# Altium PCB ES_Class6C_2L.PcbDoc
Units mil, origin at the board's own origin, x right, y up, seen from the top; angles counter-clockwise.
Board outline 1574.8 x 1181.1 mil, 2 copper layers (Top Layer, Bottom Layer), stack 62.441 mil thick; 37 components, 41 nets, 172 pads, 46 vias.
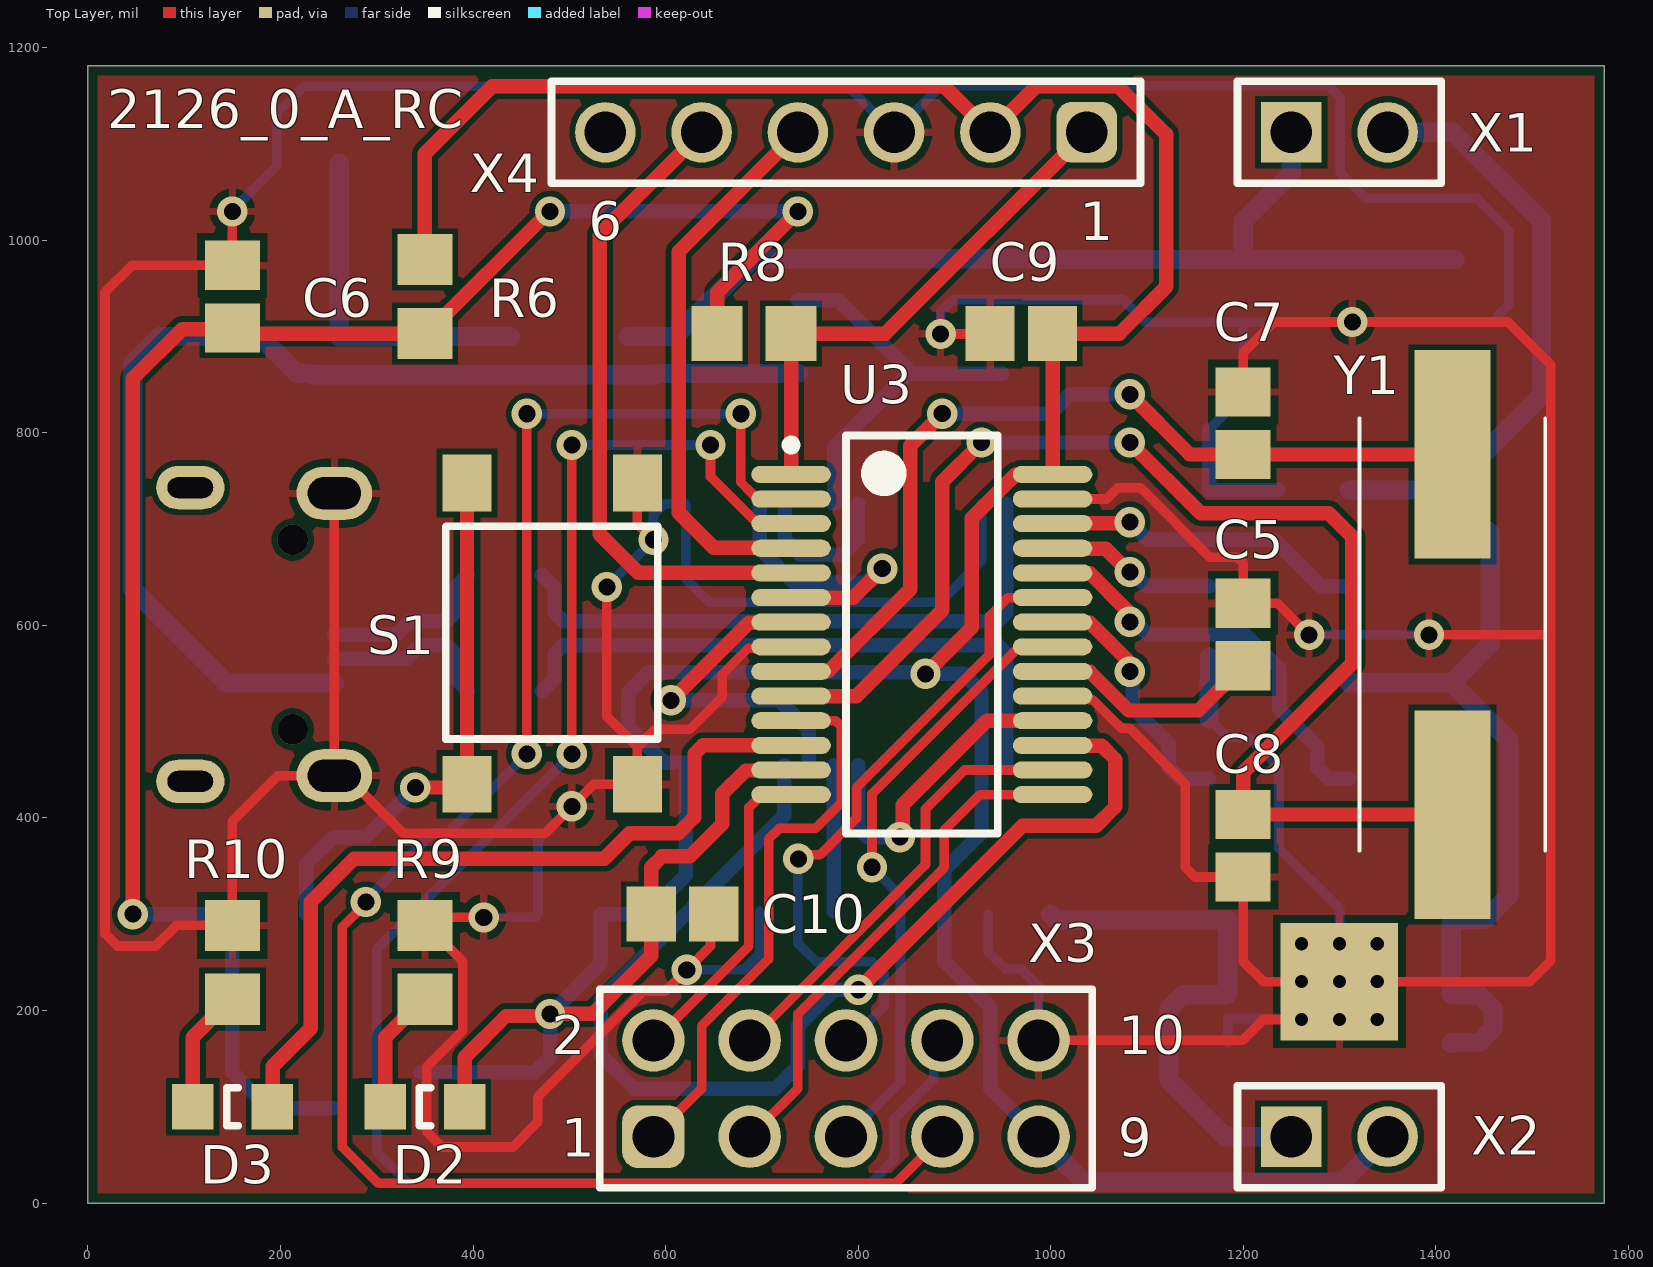
[diagram p0: Top Layer view]
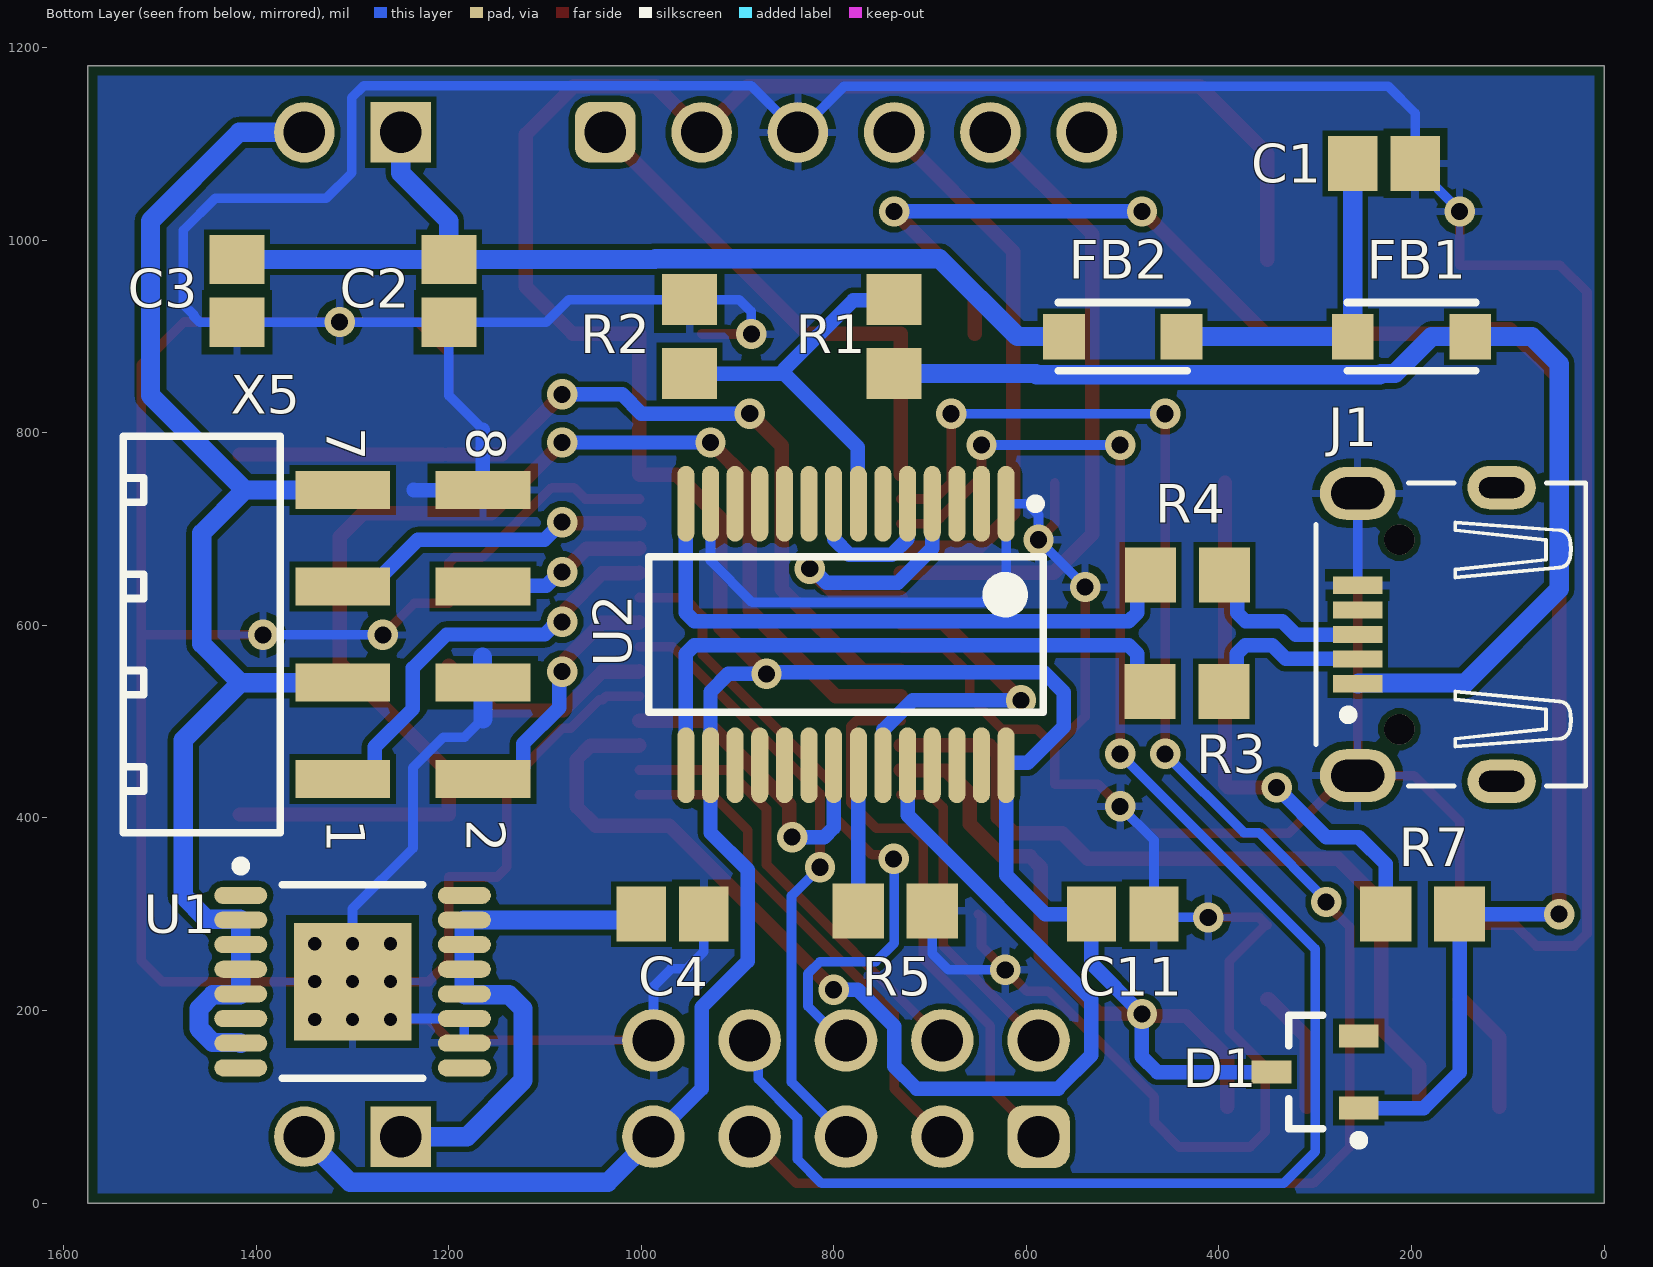
[diagram p1: Bottom Layer view, seen from below]
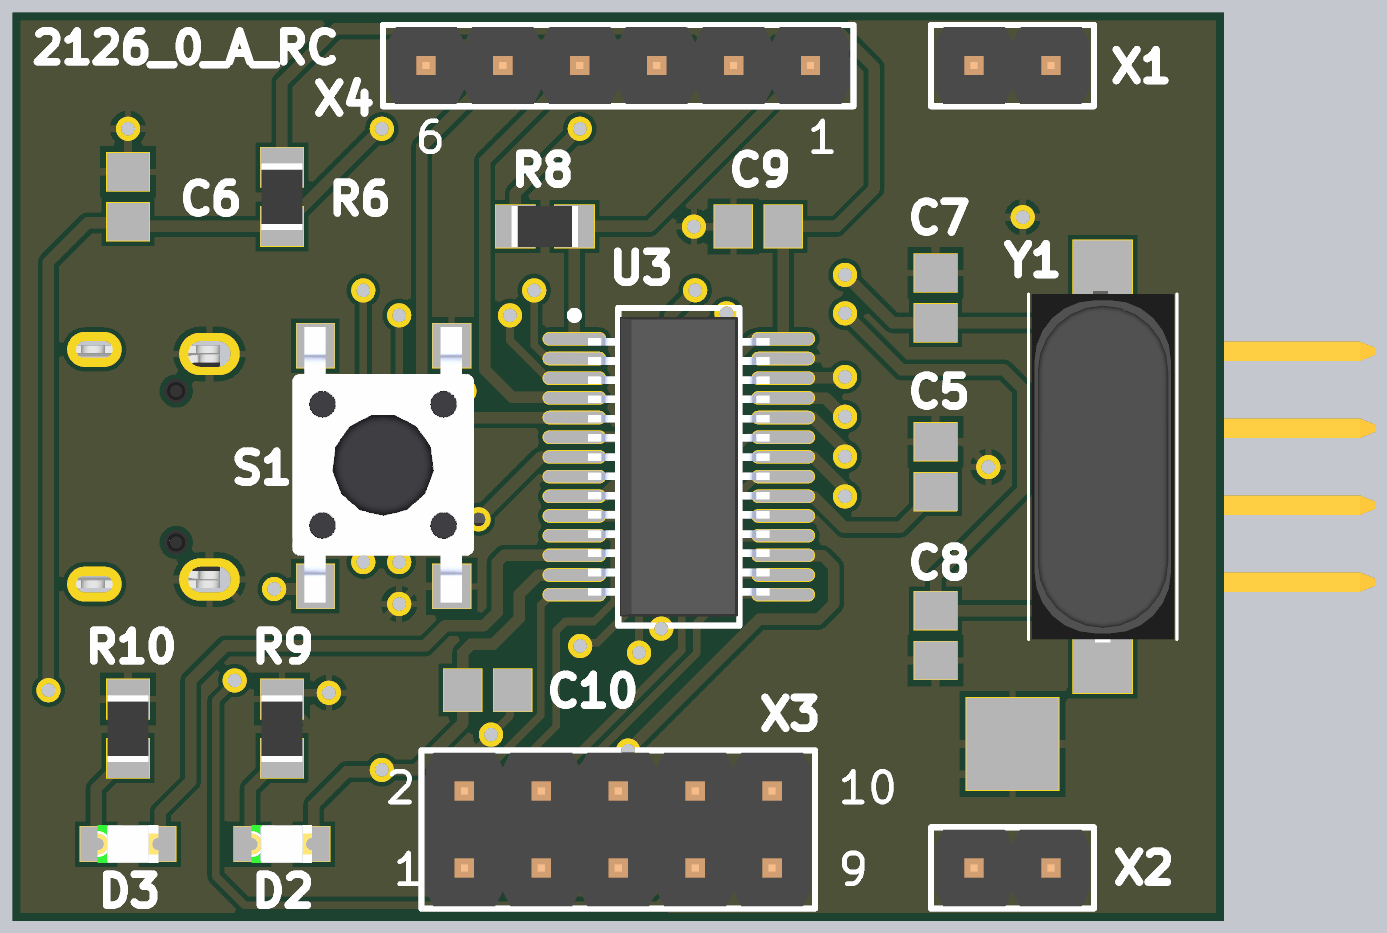
[diagram p2: 3D render of the assembled board from above, using the file's embedded part models]
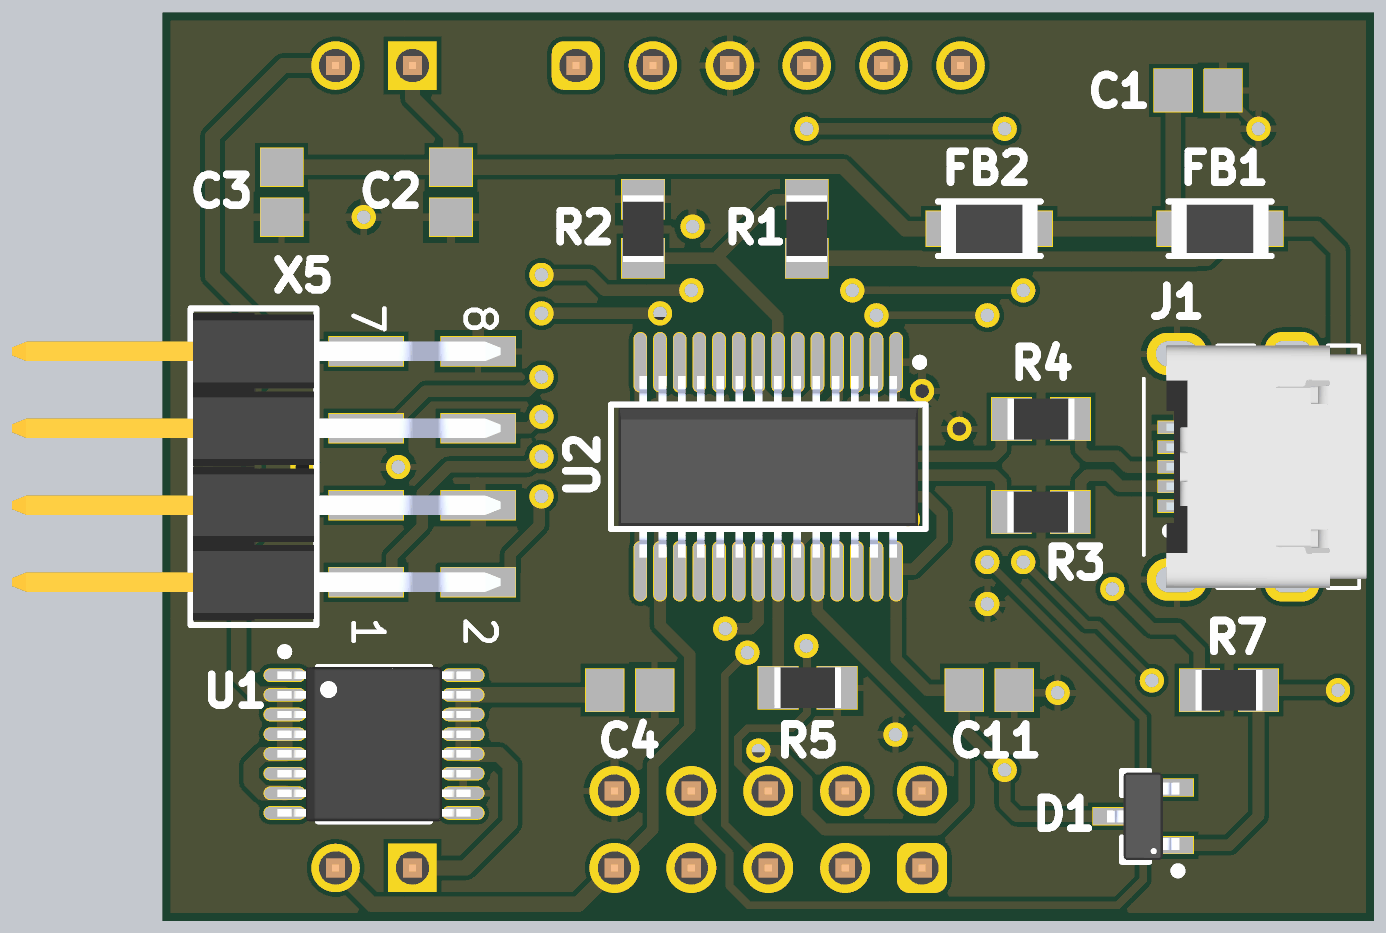
[diagram p3: 3D render of the assembled board from below, using the file's embedded part models]

## Layer stack, top to bottom
Top Solder: solder mask 0.4, Solder Resist, Dk 3.5
Top Layer: signal copper 0.7087
Dielectric1: core 61.0236, FR-4, Dk 4.8
Bottom Layer: signal copper 0.7087
Bottom Solder: solder mask 0.4, Solder Resist, Dk 3.5

## Board outline
0,0 0,1181.1 1574.8,1181.1 1574.8,0

## Design rules (kind name [scope] priority, off if disabled: settings)
BoardOutlineClearance [All] p1: gap=9.84 ignorepadtopadclearanceinfootprint=FALSE except(0: Arc-SplitContinuation Track-SplitContinuation SMDPad-SplitContinuation THPad-SplitContinuation Via-SplitContinuation Fill-SplitContinuation Poly-SplitContinuation Region-SplitContinuation Text-SplitContinuation)
Clearance Clearance-xPP-xTP-xTT [All] p1: gap=5.91 ignorepadtopadclearanceinfootprint=FALSE except(0: Arc-Hole Track-Hole SMDPad-Hole THPad-Hole Via-Hole Fill-Hole Poly-Hole Region-Hole Text-Hole; 5.92: Arc-Fill Arc-Poly Arc-Region Track-Fill Track-Poly Track-Region; 5.94: SMDPad-Fill SMDPad-Poly SMDPad-Region THPad-Fill THPad-Poly THPad-Region Via-Fill Via-Poly Via-Region Fill-Fill Fill-Poly Fill-Region Poly-Poly Poly-Region Region-Region)
ComponentClearance [All] p1: gap=9.84 collisioncheckmode=3 verticalgap=9.84 showdistances=FALSE
DiffPairsRouting [All] p1: maxlimit=9.84 minlimit=9.84 mostfreqgap=9.84 toplayer_minwidth=15 toplayer_maxwidth=15 toplayer_prefwidth=15 bottomlayer_minwidth=15 bottomlayer_maxwidth=15 bottomlayer_prefwidth=15 maxuncoupledlength=492.13
Height [All] p1: minheight=0 maxheight=984.25 prefheight=492.13
HoleSize HoleSize-PTH [All] p1: absolutevalues=TRUE maxlimit=393.7 minlimit=9.84 maxpercent=80.000 minpercent=20.000
HoleToHoleClearance [All] p1: gap=13.78 allowstackedmicrovias=TRUE
MinimumAnnularRing "Minimum IAR  >0.45mm" [((ObjectKind = 'Pad') OR (ObjectKind = 'Via')) And (Layer = 'MultiLayer') And (HoleDiameter > AsMM(0.45))] p1: minimumring=6.89 // minimum inner annular ring for pads > 0.45mm finished hole size
MinimumAnnularRing "Minimum IAR <=0.45mm" [((ObjectKind = 'Pad') OR (ObjectKind = 'Via')) And (Layer = 'MultiLayer') And (HoleDiameter <= AsMM(0.45))] p2: minimumring=6.89 // minimum inner annular ring for pads <= 0.45mm finished hole size
MinimumSolderMaskSliver [All] p1: minsoldermaskwidth=3.15
PasteMaskExpansion [All] p1: expansion=-0.98
PlaneClearance PlaneClearance-IPI [All] p1: clearance=7.87
PlaneConnect [All] p1: planeconnectstyle=Relief reliefexpansion=6.89 reliefentries=4 reliefconductorwidth=7.87 reliefairgap=7.87
PolygonConnect PolygonConnect-xTW [All] p1: connectstyle=Relief reliefconductorwidth=7.87 reliefentries=4 polygonreliefangle="90 Angle" airgapwidth=7.87
RoomDefinition 2126_0_MainBoard_AffichageMatriciel [InComponentClass('2126_0_MainBoard_AffichageMatriciel')] p1: confinementstyle=ConfineIn formatcopy=TRUE lockcomponents=FALSE outline -9842.52,-9842.52 28385,-9842.52 28385,13200 -9842.52,13200
RoutingCorners [All] p1: cornerstyle=45-Degree minsetback=98.43 maxsetback=98.43
RoutingVias RoutingViasES [All] p1: holewidth=11.81 width=25.59 viastyle="Through Hole" minholewidth=9.84 minwidth=24.02 maxholewidth=17.72 maxwidth=31.5 // finishet hole size <= 0.45mm
SilkToSilkClearance [All] p1: silktosilkclearance=7.87
SilkToSolderMaskClearance SilkscreenOverComponentPads [IsPad] p1: minsilkscreentomaskgap=7.87 clearancetoexposedcopper=TRUE
SolderMaskExpansion [All] p1: expansion=0 istentingtop=FALSE
UnRoutedNet [All] p1: checkbadconnections=TRUE
Width Width-xTW [All] p1: maxlimit=20 minlimit=10 preferedwidth=15 minimp=50.000000 maximp=50.000000 favimp=50.000000
17 further rules are at their usual default settings.

## Classes and differential pairs
differential pair class USB: D D1
differential pair D1: +D1_P -D1_N
differential pair D: +D_P -D_N

## Components (designator, comment, footprint, x,y, rotation, side; value= is the part's Value field where it differs from the comment)
C1 "6.8uF" CAPC2013X145X48NL20T23 228.54,1080 r0 bottom
C2 "10nF" CAPC2013X145X48NL20T23 1200,947.52 r90 bottom
C3 "100pF" CAPC2013X145X48NL20T23 1420,947.52 r90 bottom
C4 "6.8uF" CAPC2013X145X48NL20T23 967.52,300 r0 bottom
C5 "10uF" CAPC2013X145X48NL20T23 1200,590.55 r270 top
C6 "100nF" CAPC2013X145X48NL20T23 150,941.53 r270 top
C7 "22pF/15V" CAPC2013X145X48NL20T23 1200,810.04 r270 top
C8 "22pF/15V" CAPC2013X145X48NL20T23 1200,371.06 r90 top
C9 "100n" CAPC2013X145X48NL20T23 969.49,903.15 r0 top
C10 "100n" CAPC2013X145X48NL20T23 617.52,300 r180 top
C11 "100n" CAPC2013X145X48NL20T23 500,300 r0 bottom
D1 "BAS40" INF-SOT23_N 300,136.02 r0 bottom
D2 "GREN 1.9V" LED_0805 350,100 r0 top
D3 "GREN 1.9V" LED_0805 150,100 r0 top
FB1 "600Ohm, 2A" "WE-CBF_1206_High Speed" 200,900 r0 bottom
FB2 "600Ohm, 2A" "WE-CBF_1206_High Speed" 500,900 r0 bottom
J1 "micro-USB" 629105150521 255.91,590.55 r90 bottom
R1 "10k" RESC2013X70X40ML20T20 737.4,900 r90 bottom
R2 "20k" RESC2013X70X40ML20T20 950,900 r270 bottom value=10k
R3 "24R" RESC2013X70X40ML20T20 433.07,531.5 r0 bottom value=10k
R4 "24R" RESC2013X70X40ML20T20 432.76,652.47 r0 bottom value=10k
R5 "1k" RESC2013X70X40ML20T20 736.22,303.15 r0 bottom value=10k
R6 "10k" RESC2013X70X40ML20T20 350,941.54 r90 top
R7 "100R" RESC2013X70X40ML20T20 188.39,300 r180 bottom value=10k
R8 "1k" RESC2013X70X40ML20T20 691.93,903.15 r0 top value=10k
R9 "680R" RESC2013X70X40ML20T20 350,250 r270 top value=10k
R10 "680R" RESC2013X70X40ML20T20 150,250 r270 top value=10k
S1 "RND 210-00204" PushButton 393.7,748.03 r270 top
U1 "MAX1793EUE33+" ? 1300,230 r180 bottom
U2 "CY7C64225-28PVXCT" CYP-PVX28_N 787.4,590.55 r270 bottom
U3 "PIC32MX130F064B-I/SS" MCHP-SSOP-SS28_N 866.14,590.55 r0 top
X1 "Jumper" 61300211121 1300,1112.2 r0 top
X2 "Jumper" 61300211121 1300,68.9 r0 top
X3 "61301021121" 61301021121 787.4,118.9 r0 top
X4 "JTAG 61300611121" 61300611121 787.4,1112.2 r180 top
X5 "610108249121" 610108249121 1456.69,590.55 r270 bottom
Y1 "8MHZ" LFXTAL003151REEL 1417.32,590.55 r270 top

## Footprints (in the part's own frame and the unit in brackets; to place one, negate y for a bottom-side part, rotate by r counter-clockwise, add the part's x,y. Pads: shape width x height; smd on the part's side, far side on the other; paste and mask are expansions set on the pad)
61300211121 [mm] "Pin Header, pitch 2.54 mm, THT, Vertical, single row, 2p"
  rect 1.6x1.6 hole 1.1: 1(-1.27,0)
  round 1.6 hole 1.1: 2(1.27,0)
  silkscreen extent -2.69,-1.35 2.69,1.35, body extent -2.54,-1.27 2.54,1.27, height 8.57
61300611121 [mm] "Pin Header, pitch 2.54 mm, THT, Vertical, single row, 6p"
  rrect50% 1.6x1.6 hole 1.1: 1(-6.35,0)
  round 1.6 hole 1.1: 2(-3.81,0) 3(-1.27,0) 4(1.27,0) 5(3.81,0) 6(6.35,0)
  silkscreen extent -7.77,-1.35 7.77,1.35, body extent -7.62,-1.27 7.62,1.27, height 8.57
61301021121 [mm] "Pin Header, pitch 2.54 mm, THT, Vertical, dual row, 10p"
  rrect50% 1.65x1.65 hole 1.1: 1(-5.08,-1.27)
  round 1.65 hole 1.1: 2(-5.08,1.27) 3(-2.54,-1.27) 4(-2.54,1.27) 5(0,-1.27) 6(0,1.27) 7(2.54,-1.27) 8(2.54,1.27) 9(5.08,-1.27) 10(5.08,1.27)
  silkscreen extent -6.5,-2.62 6.5,2.62, body extent -6.35,-2.54 6.35,2.54, height 8.59
610108249121 [mm] "Pin Header, pitch 2.54 mm, SMD, Angled, dual row, 8p"
  rect 1x2.5 smd: 1(3.81,3.72) 2(3.81,7.42) 3(1.27,3.72) 4(1.27,7.42) 5(-1.27,3.72) 6(-1.27,7.42) 7(-3.81,3.72) 8(-3.81,7.42)
  silkscreen extent -5.23,-2.07 5.23,2.07, body extent -5.08,-8 5.08,8.16, height 5.1
629105150521 [mm] "WR-COM_USB_Micro Type B_Horizontal_SMT Micro Type B Horizontal SMT - 3A current at Pin1 & Pin 5 - with Pegs and THT shielding Pins  - T&R Packaging"
  rect 0.45x1.3 smd: 1(-1.3,0) 2(-0.65,0) 3(0,0) 4(0.65,0) 5(1.3,0)
  oval 1.4x2 hole 0.85 slot 1.4 at 90 deg: Z1(-3.725,0) Z2(3.725,0)
  oval 1.15x1.8 hole 0.55 slot 1.2 at 90 deg: Z4(-3.875,-3.8) Z4(3.875,-3.8)
  round 0.8 hole 0.8 unplated: ""(-2.5,-1.1) ""(2.5,-1.1)
  silkscreen extent -4,-6.02 4,1.1, body extent -4,-6.25 4,0.35, height 2.67
CAPC2013X145X48NL20T23 [mm] "Chip Capacitor, 2-Leads, Body 2.00x1.25mm, IPC Medium Density"
  rect 1.3x1.45 smd: 1(-0.825,0) 2(0.825,0)
  body extent -1.1,-0.72 1.1,0.72, height 1.45
CYP-PVX28_N [mm] "SOP, 28-Leads, Body 10.2x5.3mm, Pitch 0.65mm, IPC Medium Density"
  oval 2x0.45 smd: 1(-3.45,4.225) 2(-3.45,3.575) 3(-3.45,2.925) 4(-3.45,2.275) 5(-3.45,1.625) 6(-3.45,0.975) 7(-3.45,0.325) 8(-3.45,-0.325) 9(-3.45,-0.975) 10(-3.45,-1.625) 11(-3.45,-2.275) 12(-3.45,-2.925) 13(-3.45,-3.575) 14(-3.45,-4.225) 15(3.45,-4.225) 16(3.45,-3.575) 17(3.45,-2.925) 18(3.45,-2.275) 19(3.45,-1.625) 20(3.45,-0.975) 21(3.45,-0.325) 22(3.45,0.325) 23(3.45,0.975) 24(3.45,1.625) 25(3.45,2.275) 26(3.45,2.925) 27(3.45,3.575) 28(3.45,4.225)
  silkscreen extent -3.57,-5.2 2.05,5.2, body extent -3,-4.95 3,4.95, height 1.75
INF-SOT23_N [mm] "SOT23, 3-Leads, Body 2.9x1.3 mm, Pitch 0.95 mm, IPC Medium Density"
  rect 1.05x0.6 smd: 1(-1.15,0.95) 2(-1.15,-0.95) 3(1.15,0)
  silkscreen extent -1.27,-1.5 0.7,1.92, body extent -1.2,-1.45 1.2,1.45, height 1.1
LED_0805 [mm] "Chip LED, 2-Leads, Body 2.0x1.3mm, IPC Medium Density"
  rect 1.1x1.2 smd: A(1.05,0) K(-1.05,0)
  silkscreen extent -0.15,-0.5 0.15,0.5, body extent -1,-0.62 1,0.63, height 0.68
LFXTAL003151REEL [mm]
  rect 5.5x2 smd: 1(-4.75,0) 2(4.75,0)
  silkscreen extent -5.7,-2.45 5.7,2.45, body extent -5.81,-2.35 5.8,2.35, height 4.2
MCHP-SSOP-SS28_N [mm] "SOP, 28-Leads, Body 10.2x5.3mm, Pitch 0.65mm, IPC Medium Density"
  oval 2.1x0.45 smd: 1(-3.45,4.225) 2(-3.45,3.575) 3(-3.45,2.925) 4(-3.45,2.275) 5(-3.45,1.625) 6(-3.45,0.975) 7(-3.45,0.325) 8(-3.45,-0.325) 9(-3.45,-0.975) 10(-3.45,-1.625) 11(-3.45,-2.275) 12(-3.45,-2.925) 13(-3.45,-3.575) 14(-3.45,-4.225) 15(3.45,-4.225) 16(3.45,-3.575) 17(3.45,-2.925) 18(3.45,-2.275) 19(3.45,-1.625) 20(3.45,-0.975) 21(3.45,-0.325) 22(3.45,0.325) 23(3.45,0.975) 24(3.45,1.625) 25(3.45,2.275) 26(3.45,2.925) 27(3.45,3.575) 28(3.45,4.225)
  silkscreen extent -3.57,-5.25 2,5.25, body extent -3,-4.95 3,4.95, height 1.75
PushButton [mm]
  rect 1.5x1.3 smd: 1(0,4.496) 1(7.95,4.496) 2(0,0) 2(7.95,0)
  silkscreen extent 1.14,-0.56 6.76,5.03, body extent -0.61,-0.76 8.49,5.24, height 5.26
RESC2013X70X40ML20T20 [mm] "Chip Resistor, 2-Leads, Body 2.2x1.35mm, IPC Low Density"
  rect 1.35x1.45 smd: 1(-0.975,0) 2(0.975,0)
  body extent -1.1,-0.68 1.1,0.67, height 0.7
"WE-CBF_1206_High Speed" [mm] "SMD EMI Suppression Ferrite  Bead, body 3.2x1.6mm"
  rect 1.1x1.2 smd: 1(-1.55,0) 2(1.55,0)
  silkscreen extent -1.7,-0.9 1.7,0.9, body extent -1.6,-0.8 1.6,0.8, height 1.1
? [mm] "TSOP, 16-Leads, Body 5.00x4.40mm, Pitch 0.65mm, Thermal Pad 3.10x3.10mm, IPC Medium Density"
  oval 1.4x0.45 smd: 1(-2.95,2.275) 2(-2.95,1.625) 3(-2.95,0.975) 4(-2.95,0.325) 5(-2.95,-0.325) 6(-2.95,-0.975) 7(-2.95,-1.625) 8(-2.95,-2.275) 9(2.95,-2.275) 10(2.95,-1.625) 11(2.95,-0.975) 12(2.95,-0.325) 13(2.95,0.325) 14(2.95,0.975) 15(2.95,1.625) 16(2.95,2.275)
  rect 3.1x3.1 smd far side: 17(0,0)
  rect 3.1x3.1 smd: EPAD(0,0)
  silkscreen extent -3.08,-2.55 1.85,3.17, body extent -3.19,-2.55 3.19,2.55, height 1.1

## Part data
C1 C2 C3 C4 C5 C6 C7 C8 C9 C10 C11: library part CMP-2007-03167-1, "VJ0805Y104KNAAT", Manufacturer=Vitramon, Manufacturer 1="Vishay Vitramon", Manufacturer Part Number 1=VJ0805Y104KNAAT, Part Number=VJ0805Y104KNAAT
D1: library part CMP-1182-00023-1, "Silicon Schottky Diode, -55 to 150 degC, SOT23, Reel, Green", Manufacturer=Infineon, ComponentLink1Description="Manufacturer URL", ComponentLink1URL=http://www.infineon.com/, ComponentLink2Description=Datasheet, ComponentLink2URL=http://www.infineon.com/dgdl/bas40_bas140series.pdf?folderId=db3a30431400ef68011425f1ca2505e3&fileId=db3a304314dca389011518a57ed20e11, ComponentLink3Description="Package Specification", ComponentLink3URL=http://www.infineon.com/dgdl/SOT23-Package_Overview.pdf?folderId=db3a30431936bc4b0119532290053c66&fileId=db3a30431936bc4b0119533468123c85, Configuration=Single, CT (max)="5Â pF", Green=TRUE, IF (max)="120Â mA", Mounting Technology="Surface Mount", PackageDescription="3-Pin Small Outline Transistor Package, 1.3 x 2.9 mm Body, 0.95 mm Pitch", PackageReference=SOT23, PackageVersion=Apr-08, Packing=Reel, PartNumber=BAS40, VF (max)="1,000Â mV", VR (max)="40Â V"
D2 D3: library part 151031VS04000_G, "WL-TMRC THT Mono-color Round Color, size 3mm, Bright Green, 2.1V, 40deg", Emitting Color="Bright Green", Forward Voltage=2.1V, Operating Temperature="-40 to +85degC", Part Number=151031VS04000, Chip Technology=AlInGaP, ComponentLink1Description=Manufacturer, ComponentLink1URL=http://www.we-online.de, ComponentLink2Description=Datasheet, ComponentLink2URL=https://katalog.we-online.de/led/datasheet/151031VS04000.pdf, Dominant Wavelength=570nm, Luminous Intensity=120mcd, Mounting Technology=THT, Packaging=Bulk, Peak Wavelength=573nm, Published Date="January 2021", Publisher="Wurth Elektronik", Size=3mm, Viewing Angle=40deg
FB1 FB2: library part 74279218, "WE-CBF SMT EMI Suppression Ferrite Bead, size 1206, 600Ohm, 2A", DC Resistance max.=0.1Ohm, Manufacturer="Wurth Elektronik", Operating Temperature="-55 to +125degC", Rated Current=2A, ComponentLink1Description=Manufacturer, ComponentLink1URL=http://www.we-online.de, ComponentLink2Description=Datasheet, ComponentLink2URL=https://www.we-online.com/catalog/datasheet/74279218.pdf, Impedance @100MHz=600Ohm, Impedance max.=700Ohm, Manufacturer Part Number=74279218, Mounting Technology=SMT, Packaging="Tape and Reel", Published Date="March 2020", Size=1206, Type="High Current"
J1: library part "WR-Communication Connectors 629105150521", "WR-COM_USB_Micro Type B_Horizontal_SMT", Manufacturer="Würth Elektronik eiSos GmbH", partNo=629105150521, ComponentLink1 Description=Manufacturer, ComponentLink1URL=http://www.we-online.de, ComponentLink2 Description=Datasheet, ComponentLink2URL=http://katalog.we-online.de/em/datasheet/629105150521.pdf, Created by="Karrer Zheng", Created Date=10/21/2014, NoPins=5, Supplier=Digikey, Supplier min. qty=1, Supplier Ref.=732-5960-1-ND, Supplier unit price=2.03
R1 R2 R3 R4 R5 R6 R7 R8 R9 R10: library part CMP-1013-00623-1, "10K 0.125W 1% 0805 (2012 Metric)  SMD", Case-EIA=0805, Case-Metric=2012, Manufacturer 1="Vishay Dale", Manufacturer 2=Yageo, Manufacturer 5=Bourns, Manufacturer 6=Rohm, Manufacturer 7=Vishay, Manufacturer 10=Panasonic, Manufacturer Part Number 1=CRCW080510K0FKEC, Manufacturer Part Number 2=RC0805FR-0710KL, Manufacturer Part Number 3=CRCW080510K0FKTC, Manufacturer Part Number 4=CRCW080510K0FKEB, Manufacturer Part Number 5=CR0805-FX-1002ELF, Manufacturer Part Number 6=MCR10EZPF1002, Manufacturer Part Number 7=CRCW080510K0FKEA, Manufacturer Part Number 8=CRCW080510K0FKTB, Manufacturer Part Number 9=CRCW080510K0FKTA, Manufacturer Part Number 10=ERJ-6ENF1002V, Power="0.125 W", Supplier Part Number 1=541-10.0KCCT-ND, Tolerance="1 %", Manufacturer 3="Vishay Dale", Manufacturer 4="Vishay Dale", Manufacturer 8="Vishay Dale", Manufacturer 9="Vishay Dale", Supplier 1=Digi-Key, Technology=SMT
S1: library part PushBtn
U1: "No Description Available", Mfr_Name="Maxim Integrated Products", Copyright="Copyright (C) 2021 Ultra Librarian. All rights reserved.", Manufacturer_Part_Number=MAX1793EUE33+, RefDes=RefDes, Type=DEV
U2: "USB-to-UART Bridge Controller, 3 to 5.25 V, 0 to 70 degC, 28-Pin SSOP (PVX28), Tape and Reel", Manufacturer=Cypress, Max. Operating Temp. (degreesC)=70, Max. Operating Voltage (V)=5.25, Min. Operating Temp. (degreesC)=0, Min. Operating Voltage (V)=3, ComponentLink1Description="Manufacturer URL", ComponentLink1URL=http://www.cypress.com/, ComponentLink2Description=Datasheet, ComponentLink2URL=http://www.cypress.com/?docID=48153, ComponentLink3Description="Package Specification", ComponentLink3URL=http://www.cypress.com/?docID=1371, DatasheetVersion="Rev. *D", Memory Architecture=Flash, Mounting Technology="Surface Mount", PackageDescription="28-Pin Super Small Outline Package, Body 10.2 x 5.3 mm, Pitch 0.65 mm", PackageReference=PVX28, PackageVersion="Rev. *C, 10/2001", Packing="Tape and Reel", PartNumber=CY7C64225-28PVXCT, RoHS=Pb-Free
U3: "32-bit Microcontroller with Audio and Graphics Interface, USB and Advanced Analog, 40 MHz, 21 I/O, PMP, -40 to 85 degC, 28-pin SSOP (SS28), Tube", Manufacturer=Microchip, ComponentLink1Description="Manufacturer URL", ComponentLink1URL=http://www.microchip.com, ComponentLink2Description=Datasheet, ComponentLink2URL=http://ww1.microchip.com/downloads/en/DeviceDoc/61168E.pdf, ComponentLink3Description="Package Specification", ComponentLink3URL=http://www.microchip.com/stellent/groups/techpub_sg/documents/packagingspec/en012702.pdf, ComponentLink4Description="Product URL", ComponentLink4URL=http://www.microchip.com/PIC32MX130F064B, DatasheetVersion="Rev. E", Mounting Technology="Surface Mount", PackageDescription="28-Lead Plastic Shrink Small Outline, 10.2 x 5.3 mm Body, 0.65 mm Pitch", PackageReference=SSOP-SS28, PackageVersion=C04-073B, PartNumber=PIC32MX130F064B-I/SS
X3: "WR-PHD Pin Header, THT, pitch 2.54mm, Dual Row, Vertical, 10p", Contact Resistance=20mOhm, Manufacturer="Wurth Elektronik", Operating Temperature="-40 to +105degC", Rated Current=3A, Withstanding Voltage=500VAC, Working Voltage=250VAC, ComponentLink1Description=Manufacturer, ComponentLink1URL=http://www.we-online.de, ComponentLink2Description=Datasheet, ComponentLink2URL=https://www.we-online.com/catalog/datasheet/61301021121.pdf, Gender="Pin Header", Manufacturer Part Number=61301021121, Mounting Technology=THT, Orientation=Vertical, Packaging=Bag, Pin Number=10, Pitch=2.54mm, Row Number=Dual
X4: "WR-PHD Pin Header, THT, pitch 2.54mm, Single Row, Vertical, 6p", Contact Resistance=20mOhm, Manufacturer="Wurth Elektronik", Manufacturer Part Number=61300611121, Operating Temperature="-40 to +105degC", Rated Current=3A, Withstanding Voltage=500VAC, Working Voltage=250VAC, ComponentLink1Description=Manufacturer, ComponentLink1URL=http://www.we-online.de, ComponentLink2Description=Datasheet, ComponentLink2URL=https://www.we-online.com/catalog/datasheet/61300611121.pdf, Gender="Pin Header", Mounting Technology=THT, Orientation=Vertical, Packaging=Bag, Pin Number=6, Pitch=2.54mm, Row Number=Single
X5: "WR-PHD Pin Header, THT, pitch 2.54mm, Dual Row, Angled, 8p", Contact Resistance=20mOhm, Manufacturer="Wurth Elektronik", Manufacturer Part Number=61300821021, Operating Temperature="-40 to +105degC", Rated Current=3A, Withstanding Voltage=500VAC, Working Voltage=250VAC, ComponentLink1Description=Manufacturer, ComponentLink1URL=http://www.we-online.de, ComponentLink2Description=Datasheet, ComponentLink2URL=https://www.we-online.com/catalog/datasheet/61300821021.pdf, Gender="Pin Header", Mounting Technology=THT, Orientation=Angled, Packaging=Bag, Pin Number=8, Pitch=2.54mm, Row Number=Dual
Y1: library part LFXTAL003151REEL, "Crystal or Oscillator", Manufacturer_Name=IQD, Mouser2 Part Number=449-LFXTAL003151REEL, Datasheet Link=https://componentsearchengine.com//LFXTAL003151Reel.pdf, Height=4.3mm, Manufacturer_Part_Number=LFXTAL003151REEL, Mouser2 Price/Stock=https://www.mouser.com/Search/Refine.aspx?Keyword=449-LFXTAL003151REEL

## Via types
v1: diameter 31.5, hole 17.72, Top Layer to Bottom Layer, 37 vias
v2: diameter 29.53, hole 13.78, Top Layer to Bottom Layer, 9 vias

## Nets (pads, with @x,y where several pads share a name; then routed paths per layer and width w, separated by ;. In a path a pad name is that pad's centre, name@x,y a point inside that pad or via, vN(x,y) a via of type N, cw(c..) or ccw(c..) an arc to the next point about the centre after c; other vN are vias at no path point)
+3.3: C9.2 C10.2 C11.2 D1.3 D2.A R6.2 U2.16 U2.28 U3.13 U3.28 X2.2 X3.9 X4.2 | length 4231.3
  Top Layer w15: R6.2 350,1090 420,1160 889.61,1160 X4.2 985.2,1160 1070,1160 1120,1110 1120,951.61 1071.54,903.15 C9.2 U3.28 1001.45,756.37 963.07,756.37 918.07,711.37 918.07,597.84 v1(869.92,549.69) ; D2.A 391.34,151.34 434.25,194.25 477.85,194.25 v1(480,196.4) 524.51,196.4 585.04,256.93 585.04,348.82 596.22,360 625.17,360 658.86,393.69 658.86,425 683.14,449.28 729.8,449.28 U3.13
  Bottom Layer w15: D1.3 464.13,136.02 480,151.89 v1(480,196.4) 532.48,248.88 C11.2 580.57,300 621.06,340.49 621.06,455.98 619.81,457.23 598.49,457.23 561.02,494.7 561.02,530.58 581.77,551.33 868.27,551.33 v1(869.92,549.69) 909.67,549.69 928.15,531.21 U2.16 928.15,384.7 889.61,346.15 889.61,251.34 937.4,203.54 937.4,118.9 X3.9
  Bottom Layer w20: X3.9 1034.8,21.5 1302.6,21.5 X2.2
+5: U1.2 U1.3 U1.4 U1.5 U1.7 X1.2 X5.3 X5.7 | length 1474.3
  Bottom Layer w20: X5.3 1416.31,540.55 ; X5.7 1411.85,740.55 ; X1.2 1417.8,1112.2 1510,1020 1510,838.7 1411.85,740.55 ; U1.7 1416.97,166.85 1445.1,166.85 1459.61,181.36 1459.61,201.87 1445.1,216.38 1416.97,216.38 U1.5 U1.4 U1.3 U1.2 1416.97,294.8 1451.57,294.8 1475.84,319.07 1475.84,481.02 1416.31,540.55 ; 1411.85,740.55 1456.58,695.82 1456.58,580.82 1416.31,540.55
/SS1: U3.26 X5.5 | length 336.6
  Top Layer w15: U3.26 1002.49,706.23 1081.19,706.23 v1(1082.26,707.3)
  Bottom Layer w15: v1(1082.26,707.3) 1100.59,688.98 1232.28,688.98 1268.52,652.74 1280.71,640.55 X5.5
/U1CTS: U2.24 U3.17 | length 1195.5
  Top Layer w15: v1(800.19,221.5) 970.73,392.04 1047.52,392.04 1067.3,411.81 1067.3,460.63 1053.06,474.87 1002.49,474.87 U3.17
  Bottom Layer w15: U2.24 723.43,402.82 532.48,211.87 532.48,153.54 567.13,118.9 714.19,118.9 737.4,142.11 737.4,183.79 775.11,221.5 v1(800.19,221.5)
/U1RTS: U2.21 U3.18 | length 338.6
  Top Layer w15: v1(843.34,380.1) 846.5,383.25 846.5,413.8 933.68,500.98 U3.18
  Bottom Layer w15: U2.21 800.2,390.02 810.12,380.1 v1(843.34,380.1)
D1_N: R3.2 U2.15 | length 637
  Bottom Layer w15: R3.2 484.79,544.83 484.79,570.71 493.57,579.5 721.39,579.5 944.95,579.5 953.74,570.71 U2.15
D1_P: R4.2 U2.14 | length 634.5
  Bottom Layer w15: R4.2 484.66,638.96 484.66,613.25 493.57,604.34 731.68,604.34 944.95,604.34 953.74,613.13 U2.14
D_N: J1.2 R3.1 | length 179.8
  Bottom Layer w15: J1.2 256.28,565.33 330.48,565.33 344.64,579.5 372.57,579.5 381.36,570.71 381.36,544.83 R3.1
D_P: J1.3 R4.1 | length 179.7
  Bottom Layer w15: J1.3 256.28,590.18 320.19,590.18 334.35,604.34 372.39,604.34 381.18,613.13 381.18,639.27 R4.1
DLED: D3.A U3.12 | length 834
  Top Layer w15: D3.A 191.95,100.61 191.95,141.95 231.48,181.48 231.48,312.66 276.34,357.52 536.23,357.52 562.77,384.06 613.16,384.06 630,400.91 630,466.61 638.79,475.39 U3.12
GND: C1.1 C2.1 C3.1 C4.1 C5.1 C6.1 C7.1 C8.1 C9.1 C10.1 C11.1 J1.5 J1.Z1 J1.Z2 R2.1 R5.1 R9.1 R10.1 S1.1 U1.10 U1.11 U1.17 U1.EPAD U2.1 U2.13 U3.8 U3.19 U3.27 X3.10 X4.3 X5.4 X5.8 | length 9990
  Top Layer w10: v1(150,1030) C6.1 45.49,974.02 17.61,946.14 17.61,279.76 30.44,266.94 70.26,266.94 91.7,288.39 R10.1 150,396.65 197.24,443.9 J1.Z1 ; J1.Z2 J1.Z1 ; v1(411.12,296.65) 358.27,296.65 R9.1 351.97,288.39 389.45,250.91 389.45,179.1 351.97,141.62 351.97,73.89 367.66,58.2 441.32,58.2 467.06,83.94 467.06,109.92 577.15,220 599.71,220 v1(621.97,242.25) 646.65,266.94 646.65,296.65 C10.1 ; v1(538.99,639.85) 538.99,505.43 570.7,473.72 ; S1.1@570.7,748.03 570.7,705.24 586.96,688.98 v1(587.4,688.98) ; U3.8 728.84,576.28 685.84,576.28 658.86,549.3 658.86,525.82 625.17,492.13 589.1,492.13 570.7,473.72 ; v1(885.77,902.74) 936.6,902.74 C9.1 ; X3.10 1199.17,168.9 1220.91,190.63 v2(1260.63,190.63) ; U3.19 1036.54,526.57 1040.4,522.72 1043.76,522.72 1073.27,493.21 1081.69,493.21 1140,434.9 1140,348.61 1150.03,338.58 C8.1 1200,250.91 1220.91,230 v2(1260.63,230) ; U3.27 1058.19,731.3 1070,743.11 1093.23,743.11 1165.71,670.64 1194.14,670.64 1200,664.78 C5.1 1235.67,623.03 v1(1268.52,590.18) ; C7.1 1200,883.12 1231.99,915.11 v1(1313.32,915.11) 1474.89,915.11 1519.55,870.45 1519.55,590.18 ; U1.17@1339.37,232.91 v2(1339.37,230) 1497.75,230 1519.55,251.81 1519.55,590.18 ; v1(1393.09,590.18) 1519.55,590.18 ; J1.Z1 267.72,443.9 327.55,384.06 474.54,384.06 v1(502.55,412.07) 525.51,435.03 570.7,435.03 570.7,473.72
  Bottom Layer w10: v1(150,1030) 150,1030.98 196.06,1077.05 C1.1 196.06,1131.99 224.04,1159.97 789.64,1159.97 X4.3 885.73,1160.53 1288.48,1160.53 1300.82,1148.19 1300.82,1070.15 1327.17,1043.8 1442.51,1043.8 1475.84,1010.47 1475.84,933.47 1464.63,922.27 1464.63,920.9 1458.77,915.04 C3.1 C2.1 ; J1.5 J1.Z2 ; v1(411.12,296.65) 464.17,296.65 C11.1 467.52,377.04 v1(502.55,412.07) ; v1(538.99,639.85) 538.99,640.21 587.4,688.62 v1(587.4,688.98) 587.4,714.77 599.01,726.38 U2.1 621.06,648.34 645.48,623.92 884.83,623.92 928.15,667.24 U2.13 ; v1(621.97,242.25) 681.07,242.25 697.83,259.02 R5.1 ; v1(885.77,902.74) 885.97,902.94 885.97,926.03 898.32,938.39 R2.1 1075.32,938.39 1098.67,915.04 C2.1 ; C4.1 935.04,261.25 953.13,243.16 969.28,243.16 987.4,225.03 X3.10 ; 1164.57,503.11 1183.75,483.93 1205.51,483.93 1237.23,452.2 1237.23,368.51 1300,305.75 v2(1300,269.37) U1.EPAD@1300,239.37 ; 1164.57,803.27 1200,838.7 C2.1 ; U1.10 U1.11 1259.65,191.61 v2(1260.63,190.63) ; v1(1268.52,590.18) v1(1393.09,590.18)
  Bottom Layer w15: 1164.57,803.27 X5.8 1236.22,740.55 1236.65,740.98
  Bottom Layer w20: 1164.57,503.11 X5.4 1164.89,540.88 1164.89,567.15
  other v2: 1300,190.63 1339.37,190.63 1300,230 1260.63,269.37 1339.37,269.37
MISO: U3.22 X5.2 | length 265.5
  Top Layer w15: U3.22 1002.49,602.83 1040.86,602.83 1079.11,564.58 1079.11,558.9 v1@1082.26,555.74
  Bottom Layer w15: v1@1085.42,552.58 1085.42,514.51 1122.85,477.07 1122.85,452.74 1135.04,440.55 X5.2
  other v1: 1082.26,551.97
MOSI: U3.24 X5.1 | length 438.9
  Top Layer w15: U3.24 1002.49,654.01 1040.86,654.01 1079.11,615.77 1079.11,607.5 v1@1082.26,604.34
  Bottom Layer w15: v1@1082.26,604.34 1086.67,604.34 1100.46,590.55 1202.42,590.55 1237.23,555.74 1237.23,513.55 1276.84,473.95 1276.84,452.74 1289.02,440.55 X5.1
  other v1: 1082.26,603.74
MP0: U3.11 X3.1 | length 583.7
  Top Layer w10: X3.1 637.4,118.9 637.4,183.79 706.89,253.28 706.99,253.38 706.99,378.03 718.21,389.25 755.79,389.25 782.56,416.03 782.56,495.13 776.7,500.98 U3.11
MP1: U3.14 X3.2 | length 332.9
  Top Layer w10: X3.2 588.45,168.9 686.5,266.94 686.5,410.79 699.92,424.21 U3.14
MP2: U3.15 X3.3 | length 529.9
  Top Layer w10: X3.3 737.4,118.9 737.4,196.4 889.61,348.61 889.61,387.38 926.44,424.21 U3.15
MP3: U3.16 X3.4 | length 464.8
  Top Layer w10: X3.4 869.99,351.49 869.99,409.25 910.55,449.8 U3.16
MP4: U3.21 X3.5 | length 642.7
  Top Layer w10: v1(814.5,348.77) 814.37,348.89 814.37,425 961.3,571.93 961.57,571.93 967.4,577.76 U3.21
  Bottom Layer w10: X3.5 844.02,125.51 844.02,319.07 814.5,348.59 v1(814.5,348.77)
MP5: U3.23 X3.6 | length 697.2
  Top Layer w10: v1(737.88,357.52) 741.99,361.64 760.31,361.64 798.46,399.79 798.46,431.59 936.48,569.6 936.48,609.51 955.83,628.86 1001.89,628.86 U3.23
  Bottom Layer w10: v1(737.88,357.52) 737.13,356.77 737.13,270.09 756.59,250.63 814.53,250.63 826.84,238.31 826.84,204.37 791.37,168.9 X3.6
MP6: U3.2 X3.7 | length 1862
  Top Layer w10: v1(288.67,312.66) 288.67,311.25 264.1,286.68 264.1,58.2 301.87,20.43 838.93,20.43 X3.7 ; v1(455.87,466.61) v1(455.87,819.84) ; v1(678.11,819.84) 678.07,819.8 678.07,748.7 689.65,737.13 689.92,737.13 695.75,731.3 U3.2
  Bottom Layer w10: v1(288.67,312.66) 288.67,314.88 358.49,384.7 373.96,384.7 v1(455.87,466.61) ; v1(455.87,819.84) v1(678.11,819.84)
MP7: U3.3 X3.8 | length 1804.7
  Top Layer w10: v1(502.55,466.61) v1(502.55,787.4) ; v1(646.65,787.4) 646.65,754.53 689.65,711.54 689.92,711.54 695.75,705.71 U3.3
  Bottom Layer w10: v1(502.55,466.61) 300,264.06 300,53.19 332.74,20.46 812.77,20.46 837.78,45.46 837.78,87.87 878.56,128.66 878.56,160.06 X3.8 ; v1(502.55,787.4) v1(646.65,787.4)
NetC1_2: C1.2 FB1.2 FB2.1 | length 358
  Bottom Layer w20: C1.2 FB1.2 FB2.1
NetC2_2: C2.2 C3.2 FB2.2 X1.1 | length 1045.7
  Bottom Layer w20: FB2.2 609.29,900 690.16,980.87 985.13,980.87 986,980 C2.2 ; X1.1 1250,1070 1200,1020 C2.2 ; C3.2 C2.2
NetC4_2: C4.2 U1.12 U1.13 U1.14 U1.15 X2.1 | length 556.5
  Bottom Layer w20: C4.2 1006.02,293.98 U1.15 U1.14 U1.13 U1.12 1183.03,216.38 1137.36,216.38 1122.85,201.87 1122.85,127.15 1181.1,68.9 X2.1
NetC5_2: C5.2 U3.20 | length 234.1
  Top Layer w15: U3.20 1002.49,551.65 1040.86,551.65 1080.89,511.61 1153.54,511.61 C5.2
NetC6_2: C6.2 D1.1 R6.1 R7.2 R8.1 | length 1873.4
  Top Layer w15: v1(46.53,300) 46.53,856.53 97.74,907.74 148.69,907.74 C6.2 155.91,903.15 R6.1 351.97,903.15 478.82,1030 v1(480,1030) ; R8.1 653.54,946.14 v1(737.4,1030)
  Bottom Layer w15: v1(46.53,300) R7.2 150,136.02 187.4,98.62 D1.1 ; v1(480,1030) v1(737.4,1030)
NetD2_K: D2.K R9.2 | length 129.9
  Top Layer w15: D2.K 308.66,172.24 348.03,211.61 R9.2
NetD3_K: D3.K R10.2 | length 129.9
  Top Layer w15: D3.K 108.66,172.24 148.03,211.61 R10.2
NetR1_2: R1.2 R2.2 U2.7 | length 414.1
  Bottom Layer w15: R1.2 738.04,937.74 779.66,937.74 851.38,866.02 851.38,861.38 ; U2.7 775.13,726.9 775.13,785.13 851.38,861.38 ; R2.2 851.61,861.61 851.38,861.38
NetR5_2: R5.2 U2.22 | length 151.6
  Bottom Layer w15: R5.2 U2.22
NetR7_1: R7.1 S1.2 | length 566.4
  Top Layer w15: v1(340,431.59) 390.25,431.59 393.7,435.03 S1.2@393.7,748.03
  Bottom Layer w15: R7.1 226.77,352.14 254.63,380 288.41,380 v1(340,431.59)
NetU2_5: U2.5 U2.8 | length 163.1
  Bottom Layer w15: U2.5 723.94,725.86 723.94,689.45 739.79,673.6 783.83,673.6 799.68,689.45 799.68,725.86 U2.8
OSC1: C7.2 U3.9 Y1.1 | length 902.3
  Top Layer w15: U3.9 730.83,552.69 769.21,552.69 854.19,637.67 854.19,786.79 v1(887.4,820) ; v1(1082.26,840) 1144.7,777.56 C7.2 ; C7.2@1206.42,777.56 Y1.1
  Bottom Layer w15: v1(887.4,820) 1000,820 1020,840 v1@1071.54,840
OSC2: C8.2 U3.10 Y1.2 | length 1360.6
  Top Layer w15: U3.10 798.21,526.57 887.4,615.77 887.4,749.25 v1(928.15,790) ; v1(1082.26,790) 1155.78,716.48 1288.76,716.48 1313.32,691.92 1313.32,560.62 1200,447.3 C8.2 ; C8.2@1202.95,403.54 Y1.2
  Bottom Layer w15: v1(928.15,790) v1(1082.26,790)
PGEC: U3.5 X4.5 | length 676.6
  Top Layer w15: X4.5 531.7,1006.51 531.7,694.59 571.77,654.53 U3.5
PGED: U3.4 X4.4 | length 578.5
  Top Layer w15: U3.4 729.8,680.64 650,680.64 613.56,717.07 613.56,988.37 X4.4
Reset: R8.2 U3.1 X4.1 | length 539.9
  Top Layer w15: U3.1 R8.2 828.35,903.15 X4.1
SCK1: U3.25 X5.6 | length 179
  Top Layer w15: U3.25 1002.49,679.6 1057.19,679.6 v1@1082.26,654.53
  Bottom Layer w15: v1@1082.26,654.53 1085.28,654.53 1098.67,641.14 1163.98,641.14 X5.6
  other v1: 1082.26,655.51
U1RX: U2.4 U3.6 | length 301.4
  Top Layer w15: U3.6 795.08,628.94 v1(825.04,658.9)
  Bottom Layer w15: U2.4 697.83,680 733.4,644.43 808,644.43 822.47,658.9 v1(825.04,658.9)
U1TX: U2.23 U3.7 | length 350.8
  Top Layer w15: v1(605.71,522.18) 686.36,602.83 729.8,602.83 U3.7
  Bottom Layer w15: v1(605.71,522.18) 717.97,522.18 748.5,491.65 748.5,455.24 U2.23
VBUS: FB1.1 J1.1 R1.1 | length 1203.3
  Bottom Layer w20: J1.1 255.08,540.2 144.23,540.2 46.53,637.9 46.53,871.53 75,900 FB1.1 178.98,900 217.36,861.61 231.64,861.61 232.78,860.47 589.27,860.47 590.41,861.61 R1.1
pads on no net: D1.2 J1. J1.4 J1.Z4 U1.1 U1.6 U1.8 U1.9 U1.16 U2.2 U2.3 U2.6 U2.9 U2.10 U2.11 U2.12 U2.17 U2.18 U2.19 U2.20 U2.25 U2.26 U2.27 X4.6

## Polygon pours and split planes (outlines as drawn)
GND on Top Layer "GND_L01_P000" (solid, remove dead copper, pour order 0): -10,1200 1590,1200 1590,-10 -10,-10
GND on Bottom Layer "GND_L02_P001" (solid, remove dead copper, pour order 1): -10,1190 1580,1190 1580,-10 -10,-10

## Silkscreen, mask and mechanical layers (free items; w line width, h text height)
Top Overlay:
  text "2126_0_A_RC" at 20,1116.66 h40
Board Outline (ES):
  the board outline again, w10

## Text inside footprints (layer, text, board x,y; h text height)
X3: Top Overlay "10" at 1070,154.33 h40; Top Overlay "9" at 1070,48.03 h40; Top Overlay "1" at 491.73,48.03 h40; Top Overlay "2" at 481.5,154.33 h40
X4: Top Overlay "1" at 1030,1000 h40; Top Overlay "6" at 520,1000 h40
X5: Bottom Overlay "2" at 1181.1,398.82 h40 r90; Bottom Overlay "1" at 1326.77,398.82 h40 r90; Bottom Overlay "8" at 1181.1,805.91 h40 r90; Bottom Overlay "7" at 1326.77,805.91 h40 r90